# EAGLE board wl500_serialmod (EAGLE 5.02)
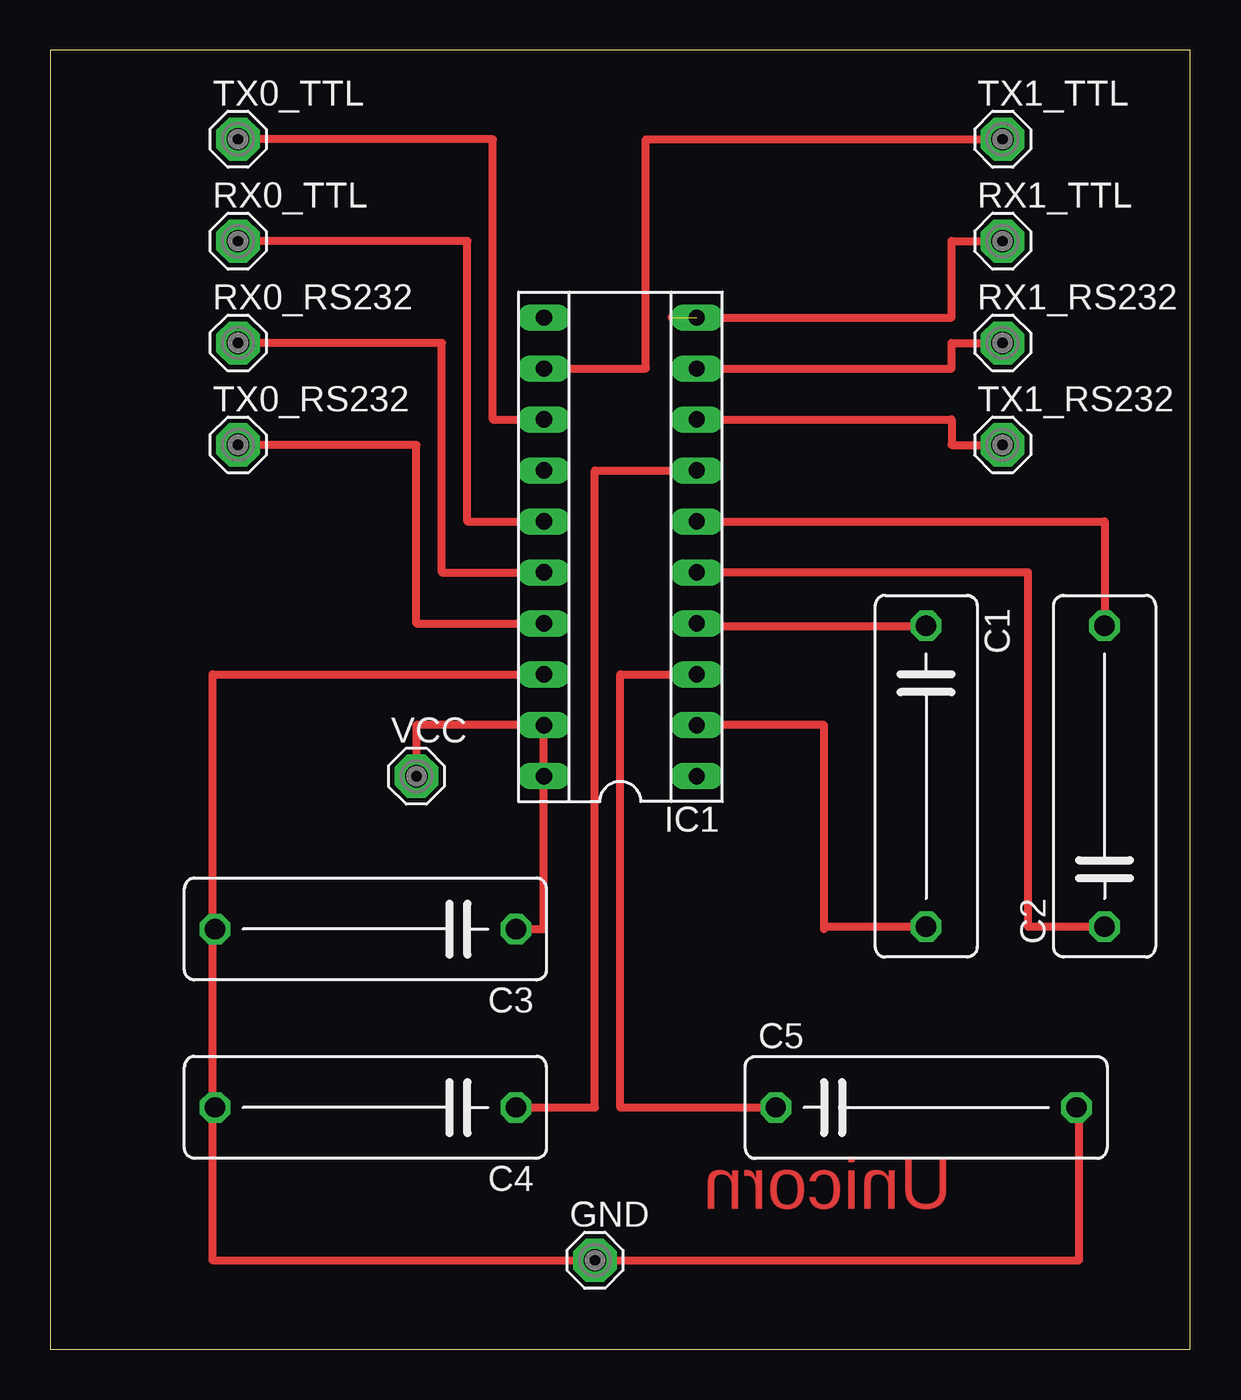
[diagram p0: board, top side]

Size 56.82 x 64.76 mm. Coordinates in mm from the lower left corner, seen from the top.
Outline: 0,0 56.82,0 56.82,64.76 0,64.76 0,0
Copper layers (1*16): Top 0.035mm / dielectric 1.5mm / Bottom 0.035mm
Design rules "default": minimum track width 10mil, minimum drill 24mil, track to track 8mil, track to pad 8mil, pad to pad 8mil, via to via 8mil, smd to smd 8mil, copper to edge 40mil, drill to drill 8mil, minimum pad ring 10mil, minimum via ring 8mil, stop-mask expansion 4mil, vias tented up to drill 0mil, thermal gap 10mil

## Footprints (pad centres in the part's own frame; a part is rotated, then mirrored left to right if it is on the bottom)
C150-054X183 = drill 1.016 octagon: 1 -7.493,0; 2 7.493,0
SE11 = drill 1.118 pad 2.159 octagon: MP 0,0
SOCKET-20 = drill 0.813 long: 1 -11.43,-3.81; 2 -8.89,-3.81; 3 -6.35,-3.81; 4 -3.81,-3.81; 5 -1.27,-3.81; 6 1.27,-3.81; 7 3.81,-3.81; 8 6.35,-3.81; 9 8.89,-3.81; 10 11.43,-3.81; 11 11.43,3.81; 12 8.89,3.81; 13 6.35,3.81; 14 3.81,3.81; 15 1.27,3.81; 16 -1.27,3.81; 17 -3.81,3.81; 18 -6.35,3.81; 19 -8.89,3.81; 20 -11.43,3.81

## Placement (x,y rotation side)
C1  100nF  [C150-054X183]  43.65,28.57 270 top
C2  100nF  [C150-054X183]  52.54,28.57 90 top
C3  100nF  [C150-054X183]  15.71,20.95 180 top
C4  100nF  [C150-054X183]  15.71,12.06 180 top
C5  100nF  [C150-054X183]  43.65,12.06 0 top
GND  SE11  [SE11]  27.14,4.44 0 top
IC1  [SOCKET-20]  28.41,40 90 top
RX0_RS232  SE11  [SE11]  9.36,50.16 0 top
RX0_TTL  SE11  [SE11]  9.36,55.24 0 top
RX1_RS232  SE11  [SE11]  47.46,50.16 0 top
RX1_TTL  SE11  [SE11]  47.46,55.24 0 top
TX0_RS232  SE11  [SE11]  9.36,45.08 0 top
TX0_TTL  SE11  [SE11]  9.36,60.32 0 top
TX1_RS232  SE11  [SE11]  47.46,45.08 0 top
TX1_TTL  SE11  [SE11]  47.46,60.32 0 top
VCC  SE11  [SE11]  18.25,28.57 0 top

## Library data of the parts
C1-C5 = resistor
GND RX0_RS232 RX0_TTL RX1_RS232 RX1_TTL TX0_RS232 TX0_TTL TX1_RS232 TX1_TTL VCC = solpad
IC1 = ic-package

## Nets
N$1: C1.2 IC1.2
N$2: C1.1 IC1.4
N$3: C2.1 IC1.5
N$4: C2.2 IC1.6
N$5: C5.1 IC1.3
N$6: C4.1 IC1.7
N$7: IC1.13 TX0_TTL.MP
N$8: IC1.12 TX1_TTL.MP
N$9: IC1.8 TX1_RS232.MP
N$10: IC1.17 TX0_RS232.MP
N$11: IC1.16 RX0_RS232.MP
N$12: IC1.15 RX0_TTL.MP
N$13: IC1.10 RX1_TTL.MP
N$14: IC1.9 RX1_RS232.MP
N$15: C3.2 C4.2 C5.2 GND.MP IC1.18
N$16: C3.1 IC1.19 IC1.20 VCC.MP

## Tracks (layer width: path | path; a pad name or v marks a point on that pad's centre or on a via)
N$1
  Top 0.406: 38.57,21.08 C1.2 | 38.57,21.08 38.57,20.95 | 38.57,21.08 38.57,31.11 IC1.2
N$2
  Top 0.406: C1.1 32.22,36.06 IC1.4
N$3
  Top 0.406: C2.1 48.73,21.08 48.73,38.73 IC1.5
N$4
  Top 0.406: C2.2 52.54,41.27 IC1.6
N$5
  Top 0.406: IC1.3 28.41,33.65 28.41,12.06 C5.1
N$6
  Top 0.406: C4.1 27.14,12.06 27.14,43.81 IC1.7
N$7
  Top 0.406: TX0_TTL.MP 22.06,60.32 22.06,46.35 IC1.13
N$8
  Top 0.406: IC1.12 29.68,48.89 29.68,60.32 TX1_TTL.MP
N$9
  Top 0.406: TX1_RS232.MP 44.92,45.08 44.92,46.35 IC1.8
N$10
  Top 0.406: IC1.17 18.25,36.19 18.25,45.08 TX0_RS232.MP
N$11
  Top 0.406: IC1.16 19.52,38.73 19.52,50.16 RX0_RS232.MP
N$12
  Top 0.406: IC1.15 20.79,41.27 20.79,55.24 RX0_TTL.MP
N$13  (1 unrouted)
  Top 0.406: RX1_TTL.MP 44.92,55.24 44.92,51.43 30.95,51.43
N$14
  Top 0.406: RX1_RS232.MP 44.92,50.16 44.92,48.89 IC1.9
N$15
  Top 0.406: IC1.18 8.09,33.65 8.09,20.95 | 8.09,20.95 C3.2 | 8.09,12.06 8.09,20.95 | 8.09,12.06 C4.2 | 8.09,12.06 8.09,4.44 GND.MP 51.27,4.44 51.27,12.06 C5.2
N$16
  Top 0.406: C3.1 24.6,20.95 IC1.20 IC1.19 18.25,31.11 VCC.MP

## Text on the board
Top: Unicorn